# Altium PCB pcb_layout.PcbDoc
Units mil, origin at the board's own origin, x right, y up, seen from the top; angles counter-clockwise.
Board outline 6000 x 4000 mil, 2 copper layers (Top Layer, Bottom Layer); 51 components, 21 nets, 128 pads, 38 vias.
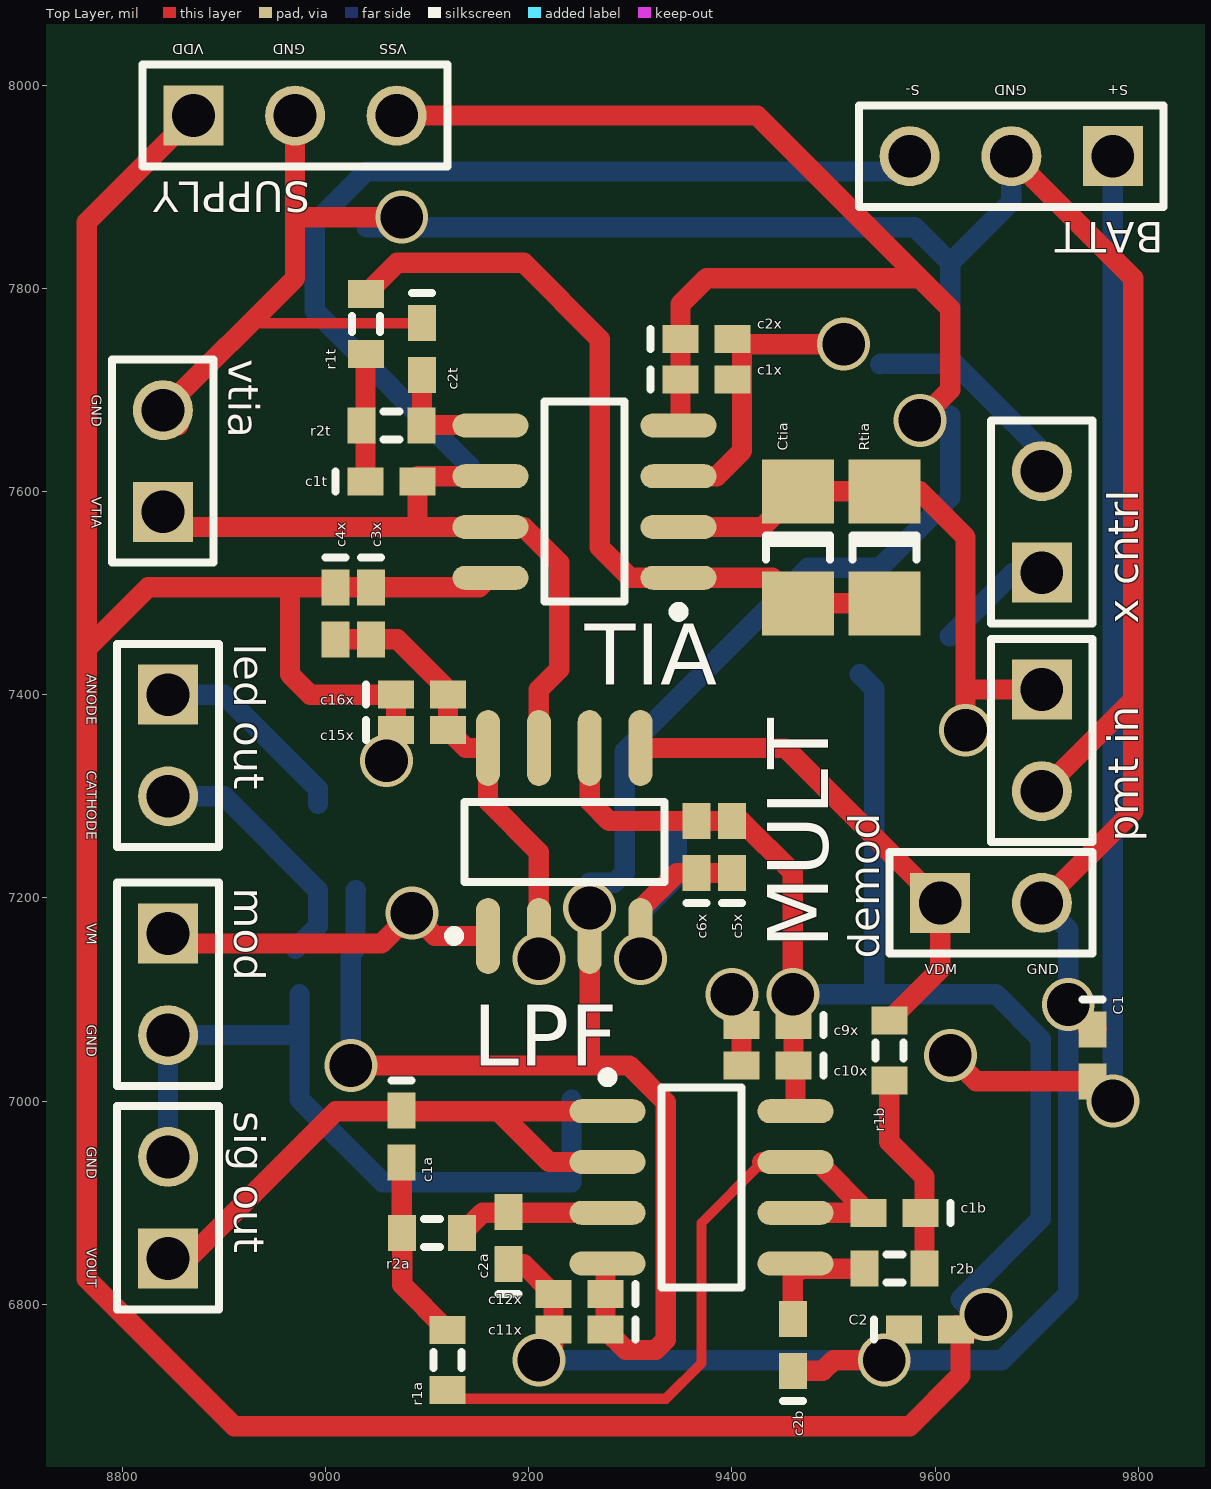
[diagram p0: Top Layer view]
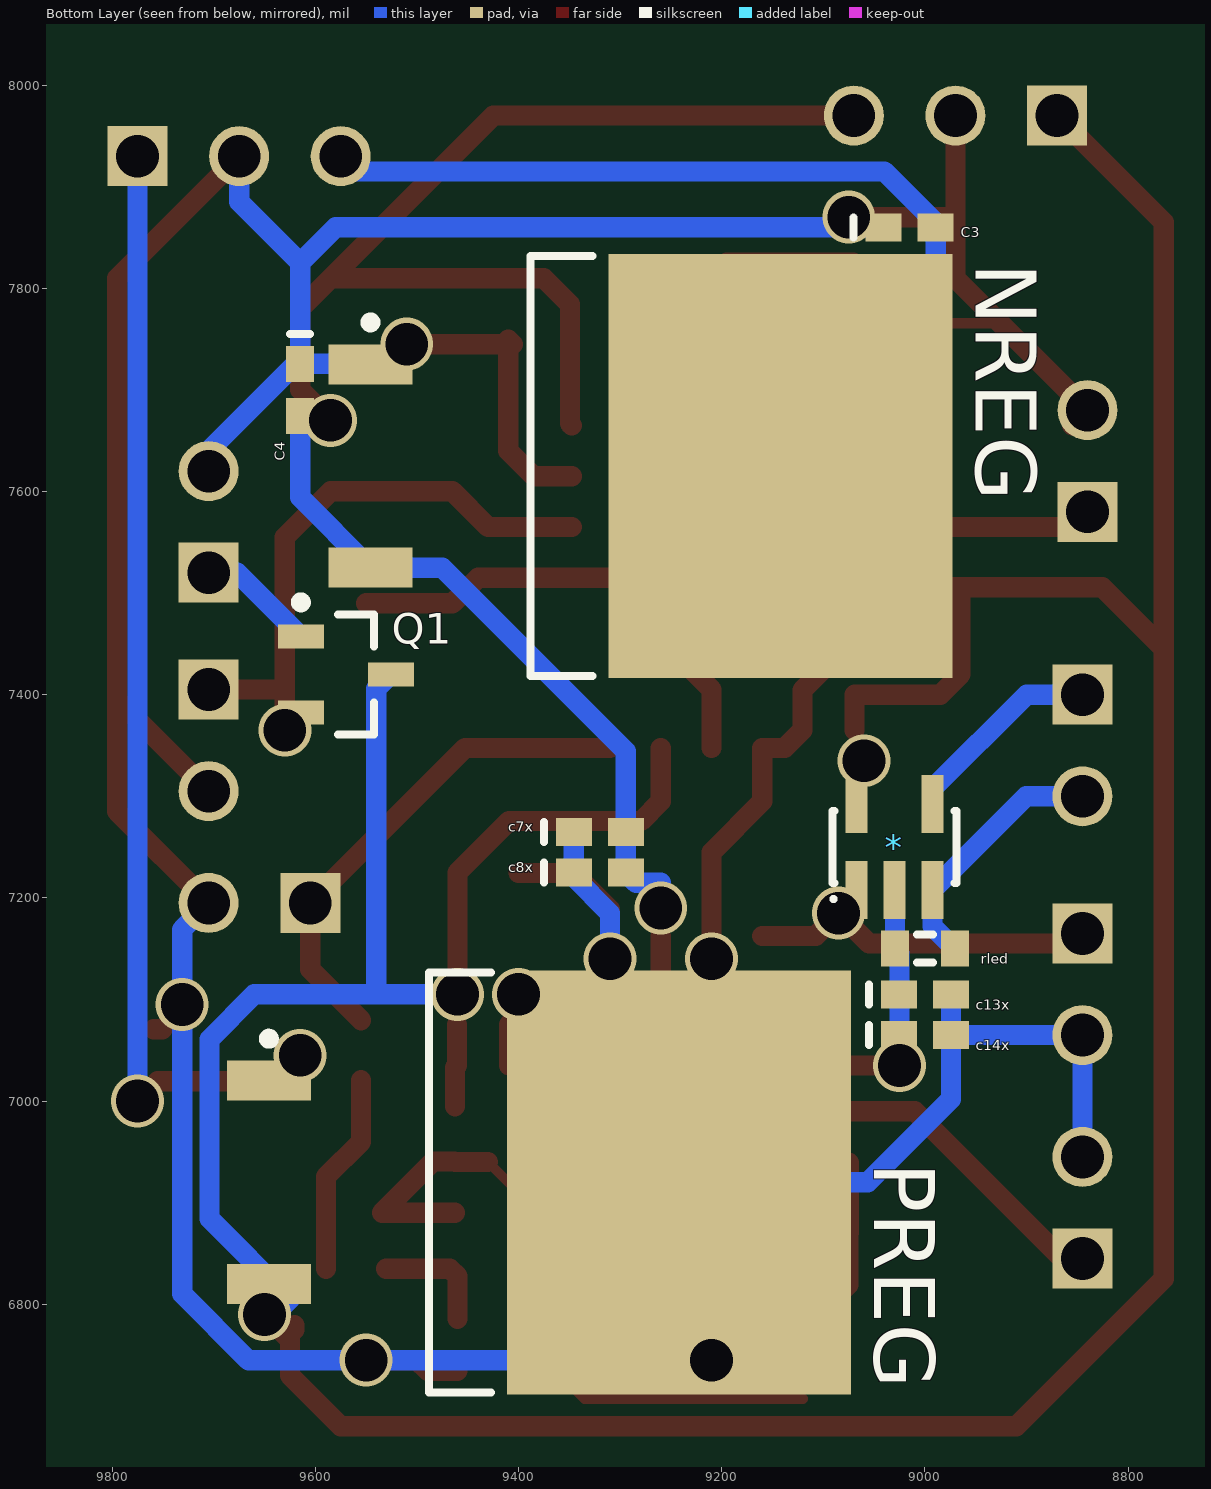
[diagram p1: Bottom Layer view, seen from below]

## Layer stack, top to bottom
Top Layer: signal copper 1.4
Dielectric: dielectric 12.6, FR-4, Dk 4.8
Bottom Layer: signal copper 1.4

## Board outline
8335,4170 14335,4170 14335,8170 8335,8170

## Design rules (kind name [scope] priority, off if disabled: settings)
Clearance [All] p1: gap=7
ComponentClearance [All] p1 off: gap=10 collisioncheckmode=3 verticalgap=10 showdistances=FALSE
Height [All] p1 off: minheight=0 maxheight=1000 prefheight=500
HoleSize [All] p1 off: absolutevalues=TRUE maxlimit=100 minlimit=1 maxpercent=80.000 minpercent=20.000
HoleToHoleClearance [All] p1 off: gap=10 allowstackedmicrovias=TRUE
LayerPairs [All] p1 off: enforce=TRUE
MinimumSolderMaskSliver [All] p1 off: minsoldermaskwidth=10
NetAntennae [All] p1 off: netantennaetolerance=0
PolygonConnect [All] p1: connectstyle=Relief reliefconductorwidth=10 reliefentries=4 polygonreliefangle="90 Angle"
RoomDefinition LIA [InComponentClass('LIA')] p1 off: confinementstyle=ConfineIn formatcopy=TRUE lockcomponents=FALSE outline 8720,6645 9855,6645 9855,8045 8720,8045
RoutingVias [All] p1: holewidth=28 width=50 viastyle="Through Hole" minholewidth=28 minwidth=50 maxholewidth=28 maxwidth=50
SilkToSilkClearance [All] p1 off: silktosilkclearance=10
SilkscreenOverComponentPads [All] p1 off: minsilkscreentomaskgap=10
SolderMaskExpansion [All] p1: expansion=4
Width [All] p1: maxlimit=100 minlimit=7 preferedwidth=10
19 further rules are at their usual default settings.

## Components (designator, comment, footprint, x,y, rotation, side; value= is the part's Value field where it differs from the comment)
* "OPA171" DBV005 9030,7250 r180 bottom
BATT "Header 3" HDR1X3 9775,7930 r180 top
C1 "C0402" 0402 9755,7045 r270 top
c1a "c1" 0402 9075,6965 r270 top
c1b "c1" 0402 9560,6890 r180 top
c1t "c1" 0402 9065,7610 r0 top
c1x "c1" 0402 9375,7710 r0 top
C2 "C0402" 0402 9595,6775 r0 top
c2a "c1" 0402 9180,6865 r90 top
c2b "c1" 0402 9460,6760 r90 top
c2t "c1" 0402 9095,7740 r270 top
c2x "c1" 0402 9375,7750 r0 top
C3 "C0402" 0402 9015,7860 r180 bottom
c3x "c1" 0402 9045,7480 r270 top
C4 "C0402" 0402 9615,7700 r270 bottom
c4x "c1" 0402 9010,7480 r270 top
c5x "c1" 0402 9400,7250 r90 top
c6x "c1" 0402 9365,7250 r90 top
c7x "c1" 0402 9320,7265 r180 bottom
c8x "c1" 0402 9320,7225 r180 bottom
c9x "c1" 0402 9435,7075 r180 top
c10x "c1" 0402 9435,7035 r180 top
c11x "c1" 0402 9250,6775 r180 top
c12x "c1" 0402 9250,6810 r180 top
c13x "c1" 0402 9000,7105 r180 bottom
c14x "c1" 0402 9000,7065 r180 bottom
c15x "c1" 0402 9095,7365 r0 top
c16x "c1" 0402 9095,7400 r0 top
Ctia "c1" 1206 9465,7545 r270 top
demod "Header 8" HDR1X2 9605,7195 r0 top
"led out" "Header 2" HDR1X2 8845,7400 r270 top
LPF "OPA2140" D008_L 9370,6915 r0 top
mod "Header 4" HDR1X2 8845,7165 r270 top
MULT "AD633" D008_L 9235,7255 r90 top
NREG "MC7915" D2PAK_L 9280,7625 r180 bottom
"pmt in" "Header 1" HDR1X2 9705,7405 r270 top
PREG "MC78M15" D2PAK_L 9380,6920 r180 bottom
Q1 "AO3162" SOT-23B_N 9570,7420 r180 bottom
r1a "c1" J1-0603 9120,6745 r90 top
r1b "c1" J1-0603 9555,7050 r270 top
r1t "c1" J1-0603 9040,7765 r270 top
r2a "c1" J1-0603 9105,6870 r0 top
r2b "c1" J1-0603 9560,6835 r180 top
r2t "c1" J1-0603 9065,7665 r0 top
rled "c1" J1-0603 9000,7150 r0 bottom
Rtia "c1" 1206 9550,7545 r270 top
"sig out" "Header 7" HDR1X2 8845,6845 r90 top
SUPPLY "Header 3" HDR1X3 8870,7970 r0 top (schematic designator SUPP)
TIA "OPA2140" D008_L 9255,7590 r180 top
vtia "Header 9" HDR1X2 8840,7580 r90 top
"x cntrl" "Header 3" HDR1X2 9705,7520 r90 top

## Footprints (in the part's own frame and the unit in brackets; to place one, negate y for a bottom-side part, rotate by r counter-clockwise, add the part's x,y. Pads: shape width x height; smd on the part's side, far side on the other; paste and mask are expansions set on the pad)
0402 [mm] "Chip Capacitor; Body 1.0 x 0.5 mm (LxW typ)"
  rect 0.9x0.7 smd: 1(-0.65,0) 2(0.65,0)
  silkscreen extent -1.4,-0.25 -1.4,0.25
1206 [mm] "Chip Capacitor; Body 3.2 x 1.6 mm (LxW typ)"
  rect 1.6x1.8 smd: 1(-1.4,0) 2(1.4,0)
  silkscreen extent -0.3,-0.8 0.3,0.8
D2PAK_L [mm] "D2-PAK, 4-Leads, Body 8.8x10.4mm, Pitch 2.54mm, Lead Span 15.1mm, IPC High Density"
  rect 2.1x1 smd: 1(-6.75,2.54) 3(-6.75,-2.54)
  rect 8.6x10.6 smd: 2(3.5,0)
  silkscreen extent -6.88,-5.25 -1.2,5.25, body extent -2.75,-5.28 6.25,5.28, height 4.69
D008_L [mm] "8-Pin Small Outline Integrated Circuit 1.27 mm Pitch, IPC High Density"
  oval 1.9x0.6 smd: 1(-2.35,1.905) 2(-2.35,0.635) 3(-2.35,-0.635) 4(-2.35,-1.905) 5(2.35,-1.905) 6(2.35,-0.635) 7(2.35,0.635) 8(2.35,1.905)
  silkscreen extent -2.47,-2.5 1,2.88, body extent -1.95,-2.45 1.95,2.45, height 1.75
DBV005 [mm] "SOT-23/SC-74A; 5 Leads; Body 3 x 3 mm, inc. leads (LxW max)"
  rect 0.55x1.45 smd: 1(-0.95,-1.075) 2(0,-1.075) 3(0.95,-1.075) 4(0.95,1.075) 5(-0.95,1.075)
  silkscreen extent -1.58,-1.35 1.55,0.9
HDR1X2 [mm] "Connector; Header; 2 Position"
  rect 1.5x1.5 hole 0.9: 1(0,0)
  round 1.5 hole 0.9: 2(2.54,0)
  silkscreen extent -1.27,-1.27 3.81,1.27
HDR1X3 [mm] "Connector; Header; 3 Position"
  rect 1.5x1.5 hole 0.9: 1(0,0)
  round 1.5 hole 0.9: 2(2.54,0) 3(5.08,0)
  silkscreen extent -1.27,-1.27 6.35,1.27
J1-0603 [mm] "Chip Resistor, Body 1.6x0.8mm, IPC High Density"
  rect 0.7x0.9 smd: 1(-0.75,0) 2(0.75,0)
  silkscreen extent -0.2,-0.35 0.2,0.35, body extent -0.85,-0.48 0.85,0.48, height 0.9
SOT-23B_N [mm] "SOT23, 3-Leads, Body 2.9x1.3mm, Pitch 0.95mm, Lead Span 2.4mm, IPC Medium Density"
  rect 1.15x0.6 smd: 1(-1.125,0.95) 2(-1.125,-0.95) 3(1.125,0)
  silkscreen extent -1.25,-1.5 0.7,1.92, body extent -0.7,-1.5 0.7,1.5, height 1.14

## Part data
BATT SUPPLY: "Header, 3-Pin"
C1 C2 C3 C4: "Ceramic Chip Capacitor - Standard"
c1a c1b c1t c1x c2a c2b c2t c2x c3x c4x c5x c6x c7x c8x c9x c10x c11x c12x c13x c14x c15x c16x: library part C0402, "Ceramic Chip Capacitor - Standard"
Ctia: library part C1210, "Ceramic Chip Capacitor - Standard"
demod mod "pmt in" "sig out" vtia "x cntrl": library part "Header 2", "Header, 2-Pin"
"led out": "Header, 2-Pin"
LPF TIA: library part OPA2211
Q1: library part QNPN, "NPN Bipolar Transistor"
r1a r1b r1t r2a r2b r2t rled Rtia: library part Res3, "Resistor"

## Via types
v1: diameter 52, hole 42, Top Layer to Bottom Layer, 38 vias

## Nets (pads, with @x,y where several pads share a name; then routed paths per layer and width w, separated by ;. In a path a pad name is that pad's centre, name@x,y a point inside that pad or via, vN(x,y) a via of type N, cw(c..) or ccw(c..) an arc to the next point about the centre after c; other vN are vias at no path point)
GND: "pmt in.2" "sig out.2" "x cntrl.2" BATT.2 C1.1 c1x.2 C2.1 c2a.1 c2b.1 c2t.1 c2x.2 C3.1 c3x.2 C4.1 c4x.2 c5x.1 c6x.1 c7x.1 c8x.1 c9x.2 c10x.2 c11x.2 c12x.2 c13x.2 c14x.2 c15x.2 c16x.2 demod.2 mod.2 MULT.2 MULT.4 MULT.8 NREG.1 PREG.2 SUPPLY.2 TIA.3 vtia.2 | length 5598.3
  Top Layer w10: 8925,7765.59 c2t.1
  Top Layer w20: vtia.2@8855,7665 v1(8840,7680) 8970,7810 8970,7870 ; v1(8970,7970) 8970,7870 ; c4x.2 c3x.2 9070.54,7454.41 9120.59,7404.36 c16x.2 c15x.2 9138.07,7347.52 MULT.8 9160,7295 9210,7245 MULT.2 ; v1(9075,7870) 8970,7870 ; c2a.1 9195,6839.41 c12x.2 c11x.2 9224.41,6759.41 v1(9210,6745) ; MULT.4 9310,7188.82 9345.59,7224.41 c6x.1 c5x.1 ; TIA.3 9385,7615 9410,7640 9410,7749.41 9405.59,7745 v1(9510,7745) ; v1(9400,7105) 9400,7084.41 c9x.2 c10x.2 ; c2b.1 9489.41,6734.41 9500,6745 v1(9550,6745) ; v1(9675,7930) 9795,7810 9795,7395 ; v1(9705,7195) 9795,7285 9795,7395 ; v1(9705,7305) 9795,7395 ; C1.1@9750.64,7070.59 C1.1 C1.1@9759.36,7070.59
  Bottom Layer w20: v1(8845,6945) v1(8845,7065) c14x.2 ; c13x.2 c14x.2 ; C3.1 9580,7860 9615,7825 ; v1(9210,6745) v1(9550,6745) 9665.81,6745 9731.09,6810.28 9731.09,7168.91 v1(9705,7195) ; PREG.2@9242.2,7001.61 PREG.2 9056.19,6920 8974.41,7001.78 c14x.2 ; v1(9310,7140) 9310,7185 9345.59,7220.59 c8x.1 c7x.1 ; NREG.1@9510,7740 v1(9510,7745) ; NREG.1 9546.34,7725.59 C4.1 ; v1(9675,7930) 9675,7885 9615,7825 ; v1(9705,7620) 9705,7639.95 9619.36,7725.59 C4.1 ; C4.1 9615,7825
  other v1: 9731.09,7095 9210,7140
IIN: "pmt in.1" Ctia.1 Q1.2 Rtia.1 TIA.2 | length 580.7
  Top Layer w20: TIA.2 9429.88,7565 Ctia.1 Rtia.1 9584.88,7600.12 9630,7555 9630,7405 ; v1(9630,7365) 9630,7405 ; v1(9705,7405) 9630,7405
LEDA: "led out.1" *.4 | length 201
  Bottom Layer w20: v1(8845,7400) 8900,7400 8992.6,7307.4 *.4
LEDK: "led out.2" *.3 rled.1 | length 252.7
  Bottom Layer w20: v1(8845,7300) 8900.28,7300 *.3 8992.6,7172.13 rled.1
Netc1a_2: c1a.2 r1a.2 r2a.1 | length 183.5
  Top Layer w20: c1a.2 9075,6870.47 r2a.1 9075.47,6819.06 r1a.2
Netc1b_1: c1b.1 r1b.2 r2b.1 | length 199.8
  Top Layer w20: r1b.2 9555,6960 9589.53,6925.47 r2b.1
Netc1t_1: c1t.1 r1t.2 r2t.1 | length 124.9
  Top Layer w20: c1t.1 r1t.2@9039.41,7734.88
Netc2a_2: c2a.2 LPF.3 r2a.2 | length 151.2
  Top Layer w20: r2a.2 9154.53,6890 LPF.3
Netc2b_2: c2b.2 LPF.5 r2b.2 | length 115.5
  Top Layer w20: c2b.2 9460,6827.48 9467.52,6835 r2b.2
Netc2t_2: c2t.2 r2t.2 TIA.5 | length 115.9
  Top Layer w20: c2t.2 9095,7665.47 TIA.5@9162.01,7665.47
SUP+: BATT.1 C1.2 PREG.1 | length 1080.6
  Top Layer w20: v1(9615,7045) 9640.59,7019.41 C1.2
  Bottom Layer w20: v1(9775,7000) v1(9775,7930)
SUP-: BATT.3 C3.2 NREG.2 | length 915.4
  Bottom Layer w20: NREG.2 8989.41,7777.8 C3.2 8989.41,7864.36 9040.05,7915 9560,7915 v1(9575,7930)
VDD: *.5 C2.2 c3x.1 c4x.1 c5x.2 c6x.2 c9x.1 c10x.1 c15x.1 c16x.1 LPF.8 MULT.6 PREG.3 Q1.3 SUPPLY.1 TIA.8 | length 4248.7
  Top Layer w20: v1(8870,7970) 8765,7865 8765,7445 ; 8965,7505.59 8965,7420 8985,7400 c16x.1 c15x.1 ; TIA.8@9161.7,7515.78 9151.51,7505.59 c3x.1 c4x.1 8825.59,7505.59 8765,7445 ; MULT.6 9260,7295 9279.41,7275.59 c6x.2 c5x.2 9409.41,7275.59 9460,7225 v1(9460,7105) ; c9x.1 c10x.1 9462.52,7033.07 LPF.8@9462.52,6995 ; C2.2 C2.2@9620.59,6779.36 ; v1(9650,6790) 9625,6765 9625,6730 9575,6680 8910,6680 8765,6825 8765,7445
  Bottom Layer w20: v1(9460,7105) 9540,7105 ; Q1.3 9540,7405.71 9540,7105 ; v1(9650,6790) 9640,6790 9625,6805 9704.09,6884.09 9704.09,7060.91 9660,7105 9540,7105
  other v1: 9060,7335
VDM: demod.1 MULT.5 r1b.1 | length 494.4
  Top Layer w20: MULT.5 9452.48,7347.52 v1(9605,7195) 9605,7129.53 r1b.1
VGS: "x cntrl.1" Q1.1 | length 116.6
  Bottom Layer w20: Q1.1 9676.89,7520 v1(9705,7520)
VM: *.1 mod.1 MULT.1 | length 336.8
  Top Layer w20: mod.1@8845,7155 9055,7155 v1(9085,7185) 9107.52,7162.48 MULT.1
  other v1: 8845,7165
VOUT: "sig out.1" c1a.1 LPF.1 LPF.2 | length 609.3
  Top Layer w20: v1(8845,6845) 8865,6845 9010,6990 9175,6990 ; LPF.1@9268.07,6990 9175,6990 ; LPF.2 9220,6940 9175,6985 9175,6990
VS1: c1b.2 LPF.6 LPF.7 r1a.1 | length 684.8
  Top Layer w10: r1a.1@9120,6707 9335,6707 9370,6742 9370,6880 LPF.7@9430,6940
  Top Layer w20: LPF.7@9430,6940 LPF.7 9463.11,6940.59 9483.82,6940.59 c1b.2 LPF.6
VSS: *.2 c1x.1 c2x.1 C4.2 c7x.2 c8x.2 c11x.1 c12x.1 c13x.1 c14x.1 LPF.4 MULT.3 NREG.3 rled.2 SUPPLY.3 TIA.4 | length 2799.6
  Top Layer w20: v1(9025,7035) 9255,7035 ; v1(9070,7970) 9425,7970 9585,7810 ; MULT.3 9260,7040 9255,7035 ; LPF.4@9275.59,6840 c11x.1 9295.59,6755 9325,6755 9335,6765 9335,6998.82 9298.82,7035 9255,7035 ; TIA.4 9349.41,7666.89 c1x.1 c2x.1 9349.41,7784.41 9375,7810 9585,7810 ; v1(9585,7670) 9615,7700 9615,7780 9585,7810
  Bottom Layer w20: v1(9025,7035) 9025,7145.47 rled.2 9029.53,7207.21 *.2 ; v1(9260,7190) 9260,7215 9284.41,7215 c8x.2 c7x.2 9294.41,7344.41 9475,7525 NREG.3 9615,7594.25 C4.2
VT1: Ctia.2 r1t.1 Rtia.2 TIA.1 | length 781.5
  Top Layer w20: r1t.1 9070.47,7825 9195,7825 9270,7750 9270,7545 9300,7515 TIA.1 9439.88,7515 Ctia.2 Rtia.2
VTIA: c1t.2 MULT.7 TIA.6 TIA.7 vtia.1 | length 712.8
  Top Layer w20: v1(8840,7580) 8855,7565 TIA.7 9195,7565 9230,7530 9230,7425 9210,7405 MULT.7 ; 9090.59,7570.59 c1t.2 ; c1t.2@9090.59,7615 TIA.6

## Silkscreen, mask and mechanical layers (free items; w line width, h text height)
Top Overlay:
  text "VDD" at 8880,8040 h10 r180
  text "GND" at 8980,8040 h10 r180
  text "VSS" at 9080,8040 h10 r180
  text "S-" at 9585,8000 h10 r180
  text "GND" at 9690,8000 h10 r180
  text "S+" at 9790,8000 h10 r180
  text "GND" at 8770,7695 h10 r270
  text "VTIA" at 8770,7595 h10 r270
  text "ANODE" at 8765,7420 h10 r270
  text "CATHODE" at 8765,7325 h10 r270
  text "VM" at 8765,7175 h10 r270
  text "VDM" at 9590,7125 h10
  text "GND" at 9690,7125 h10
  text "GND" at 8765,7075 h10 r270
  text "GND" at 8765,6955 h10 r270
  text "VOUT" at 8765,6855 h10 r270